# Altium PCB 32-S297PCB.PcbDoc
Units mil, origin at the board's own origin, x right, y up, seen from the top; angles counter-clockwise.
Board outline 3930 x 3915 mil, 2 copper layers (Top Layer, Bottom Layer); 21 components, 42 nets, 117 pads, 0 vias.
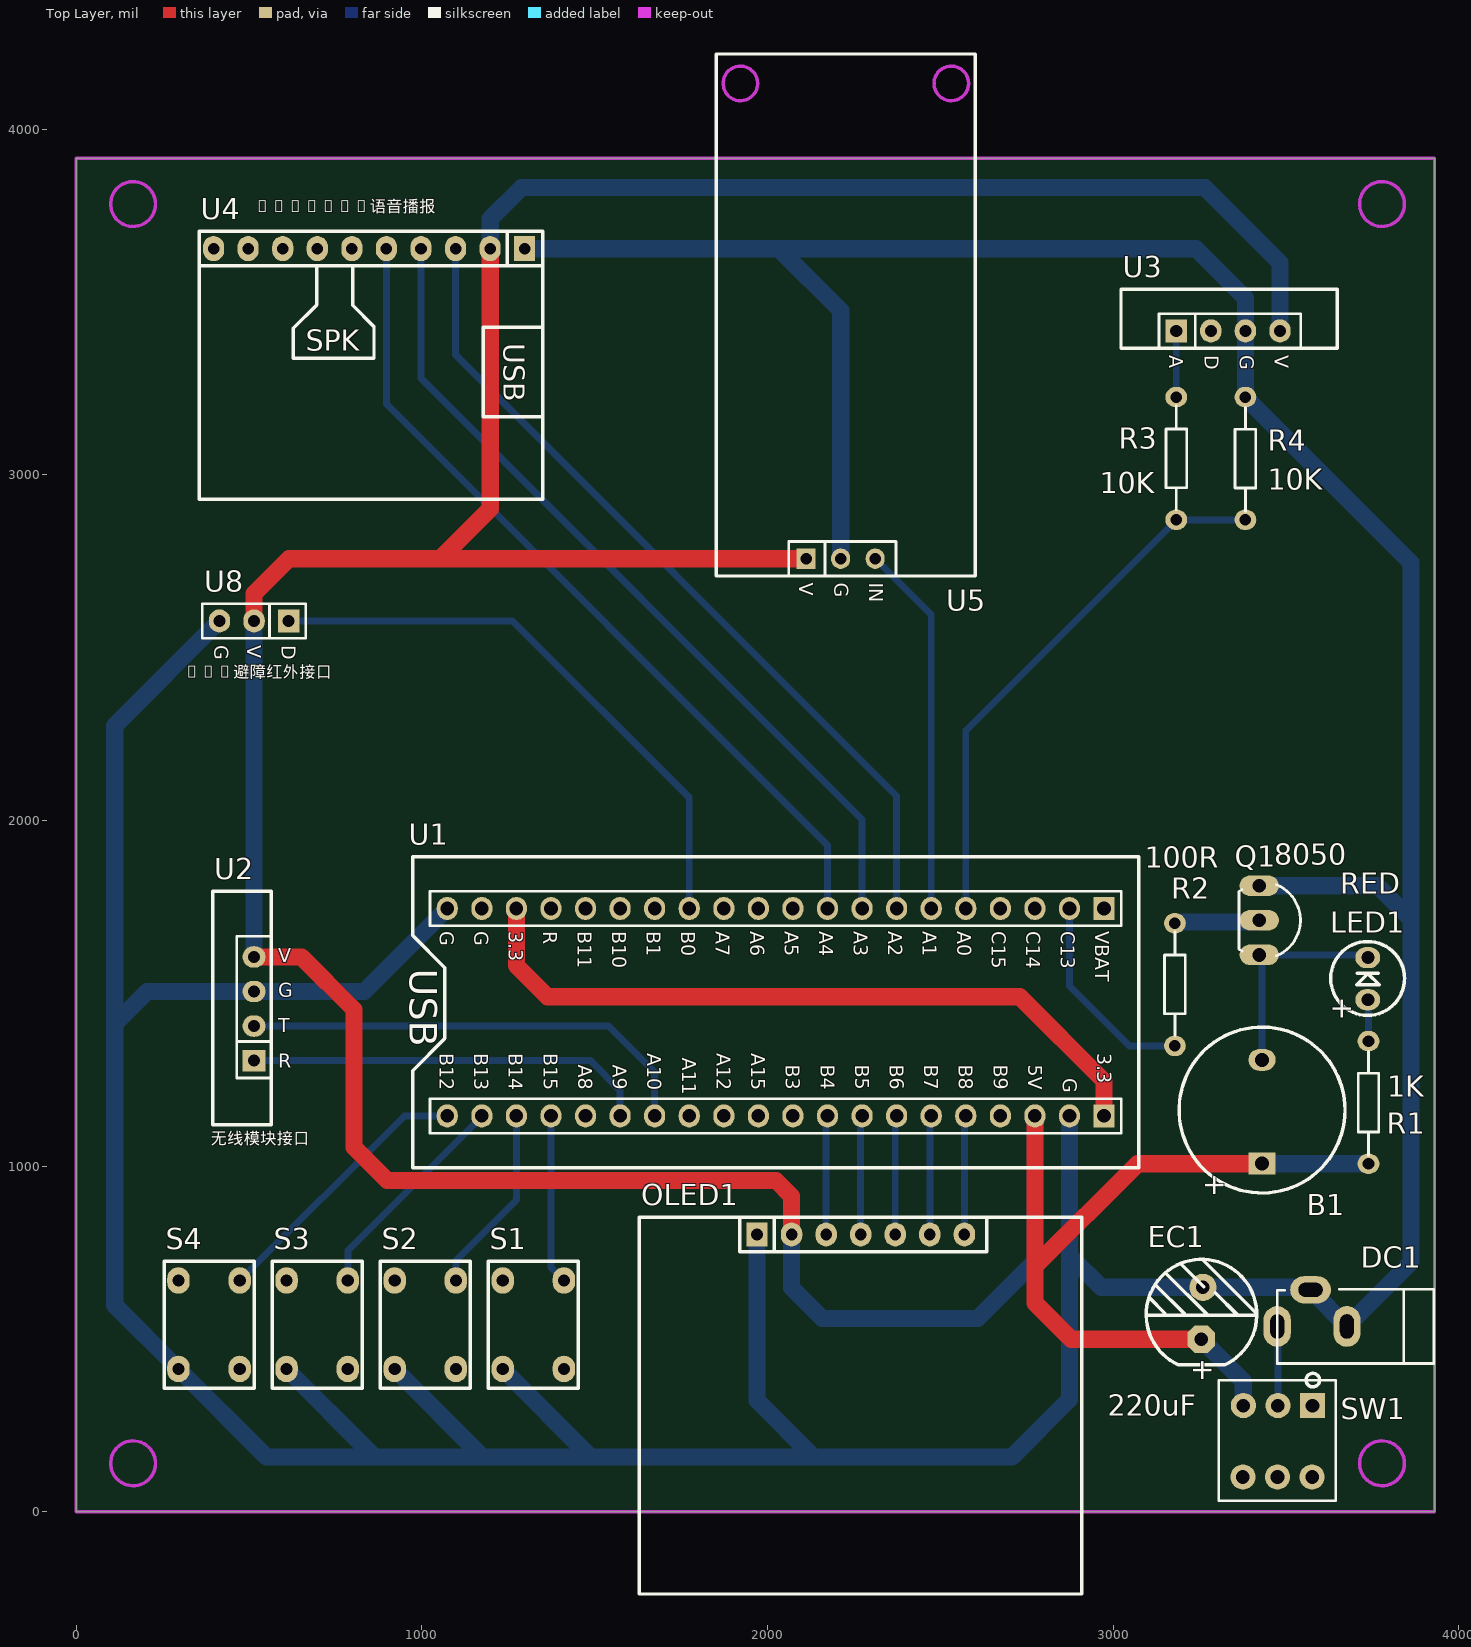
[diagram p0: Top Layer view]
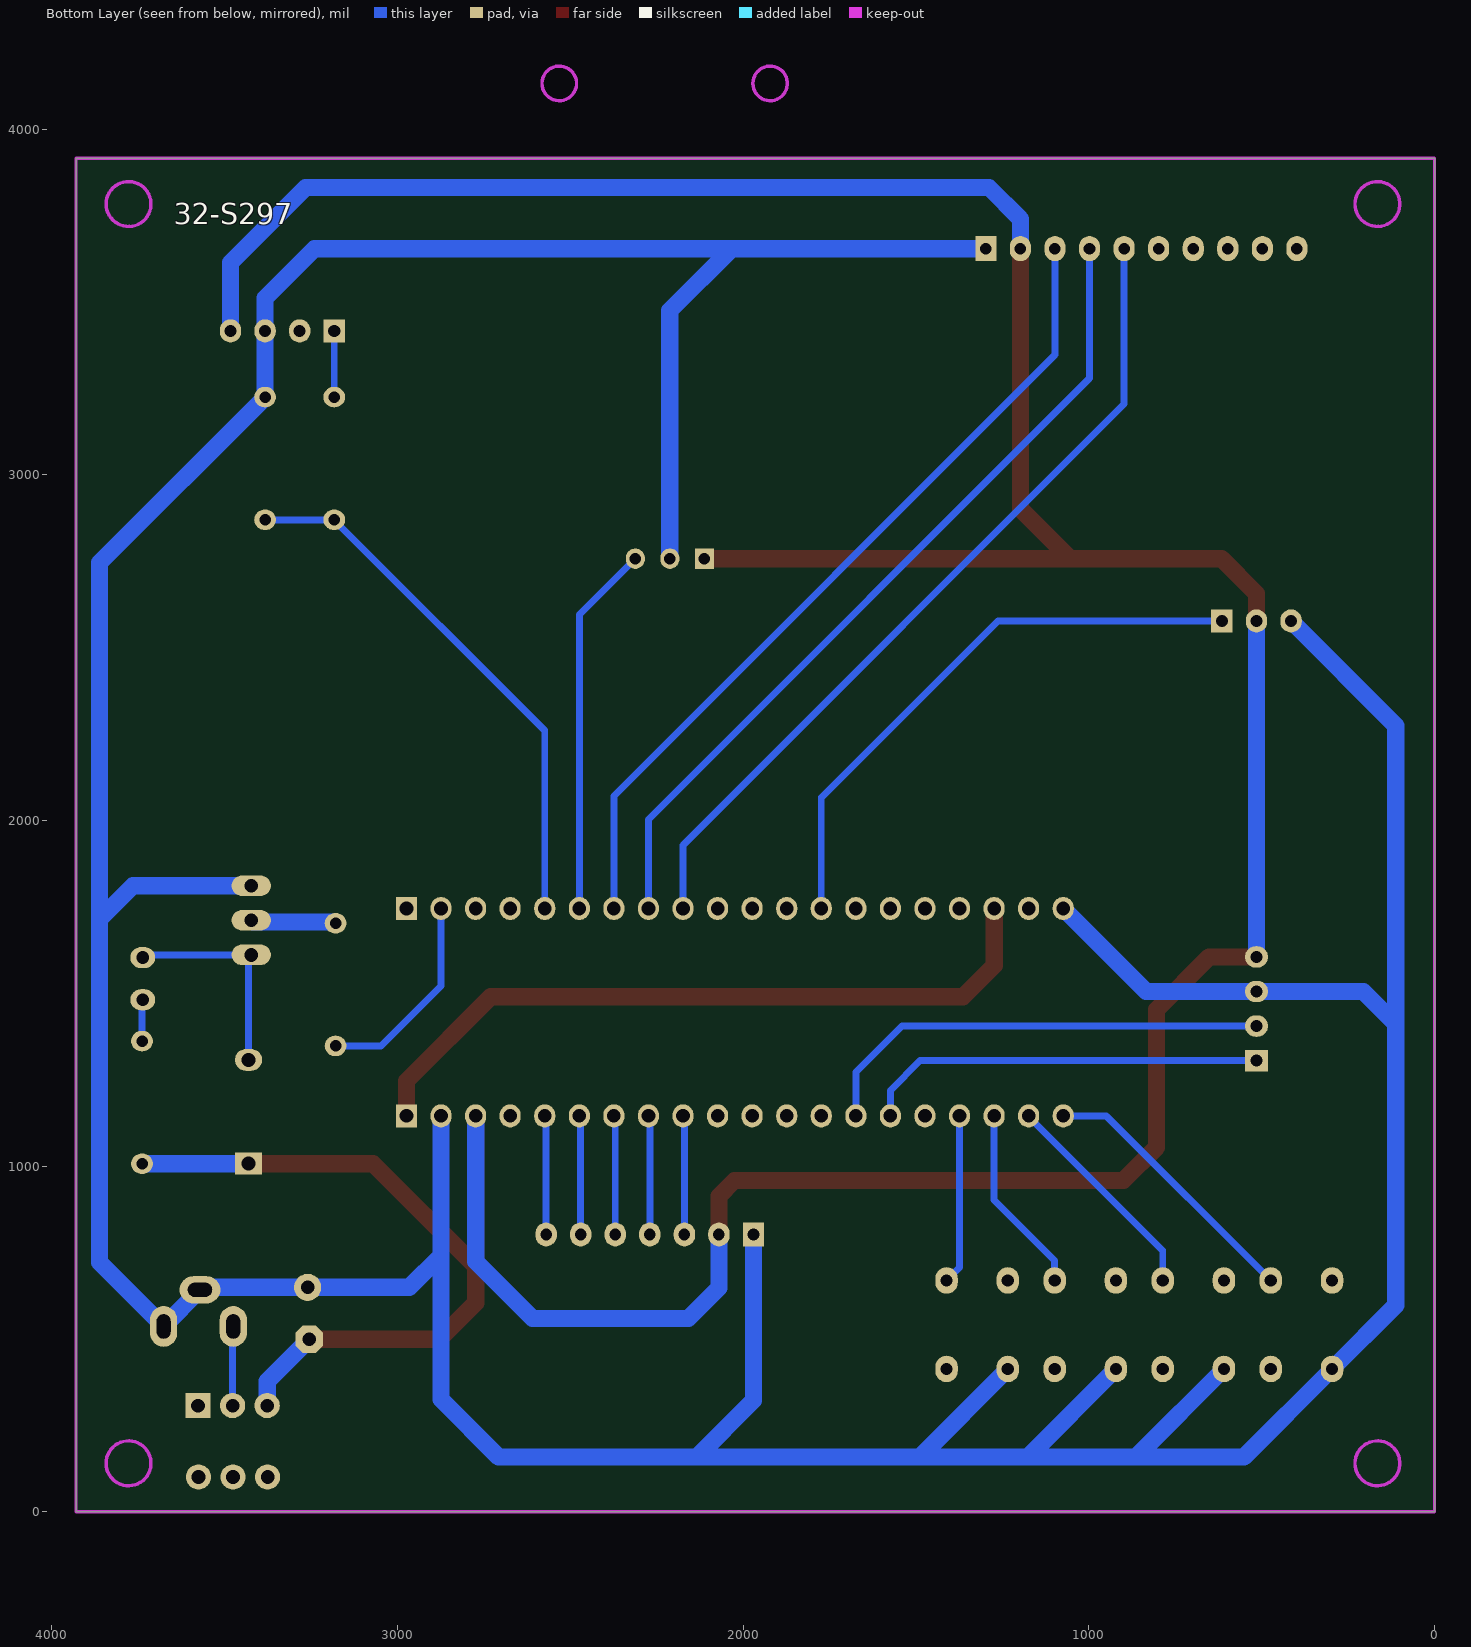
[diagram p1: Bottom Layer view, seen from below]

## Layer stack, top to bottom
Top Solder: solder mask 0.4, Solder Resist, Dk 3.5
Top Layer: signal copper 1.4
Dielectric1: dielectric 12.6, FR-4, Dk 4.8
Bottom Layer: signal copper 1.4
Bottom Solder: solder mask 0.4, Solder Resist, Dk 3.5

## Board outline
0,0 0,3915 3930,3915 3930,0

## Design rules (kind name [scope] priority, off if disabled: settings)
Clearance [All] p1: gap=12
ComponentClearance [All] p1 off: gap=10 collisioncheckmode=3 verticalgap=10 showdistances=FALSE
FabricationTestpoint [(IsPad And (OnTopLayer Or OnBottomLayer))] p1: side=3 testpointundercomponent=TRUE minsize=40 maxsize=100 preferedsize=60 minholesize=0 maxholesize=40 preferedholesize=32 testpointgrid=1 allowsidetop=TRUE allowsidebottom=TRUE usegrid=TRUE gridtolerance=0.01
Height [All] p1 off: minheight=0 maxheight=1000 prefheight=500
HoleSize [All] p1 off: absolutevalues=TRUE maxlimit=100 minlimit=1 maxpercent=80.000 minpercent=20.000
LayerPairs [All] p1 off: enforce=TRUE
PlaneClearance [All] p1 off: clearance=20
PlaneConnect [All] p1 off: planeconnectstyle=Relief reliefexpansion=20 reliefentries=4 reliefconductorwidth=10 reliefairgap=10
PolygonConnect [All] p1 off: connectstyle=Relief reliefconductorwidth=10 reliefentries=4 polygonreliefangle="90 Angle" airgapwidth=10
RoutingVias [All] p1: holewidth=28 width=50 viastyle="Through Hole" minholewidth=28 minwidth=50 maxholewidth=28 maxwidth=50
SilkToSolderMaskClearance SilkscreenOverComponentPads [IsPad] p1: minsilkscreentomaskgap=10 clearancetoexposedcopper=TRUE
SolderMaskExpansion [All] p1: expansion=4
Width [All] p1: maxlimit=100 minlimit=12 preferedwidth=20
22 further rules are at their usual default settings.

## Components (designator, comment, footprint, x,y, rotation, side; value= is the part's Value field where it differs from the comment)
B1 "BUZZER" BUZZERSOT_PLASTIC 3431,1007 r90 top
DC1 "DC接口" DC-JACK-002 3475,536 r0 top
EC1 "220uF" RB.15/.3 3255,499 r90 top
LED1 "RED" LED_D3MM12 3737,1481 r90 top
OLED1 "OLED" OLED_0_96 1970,802 r0 top
Q1 "8050" TO-92 3423,1711 r270 top
R1 "1K" AXIAL0.3 3739,1184 r90 top
R2 "100R" AXIAL0.3 3179,1525 r270 top
R3 "10K" AXIAL0.3 3183,3047 r270 top
R4 "10K" AXIAL0.3 3383,3047 r90 top
S1 "BUTTOM" BUTTON_6x6DIP 1323,541 r90 top
S2 "BUTTOM" BUTTON_6x6DIP 1010.33,541 r90 top
S3 "BUTTOM" BUTTON_6x6DIP 697.67,541 r90 top
S4 "BUTTOM" BUTTON_6x6DIP 385,541 r90 top
SW1 "SW-DPDT" SW 3577,307 r270 top
U1 "STM32_CORE_BLUE" STM32_CORE_BLUE 2974,1745 r270 top
U2 "无线模块接口" 蓝牙MODE竖放 515,1305 r0 top
U3 "传感器模块" 通用MODE竖放 3183,3416 r270 top
U4 "JR6001_语音播报" JR6001_语音播报 1298,3654 r0 top
U5 "继电器模块" 继电器接口 2112,2757 r270 top
U8 "E18避障红外接口" 红外接口 615,2577 r270 top

## Footprints (in the part's own frame and the unit in brackets; to place one, negate y for a bottom-side part, rotate by r counter-clockwise, add the part's x,y. Pads: shape width x height; smd on the part's side, far side on the other; paste and mask are expansions set on the pad)
AXIAL0.3 [mm]
  oval 1.5x1.6 hole 0.85: 1(-4.508,0) 2(4.508,0)
  silkscreen extent -3.87,-0.76 3.75,0.76
BUTTON_6x6DIP [mm]
  oval 1.95x1.65 hole 0.9: 1(-3.25,2.25) 2(3.25,-2.25) ""(-3.25,-2.25) ""(3.25,2.25)
  round 1 on Top Overlay: 3(0,0)
  silkscreen extent -4.67,-3.3 4.67,3.3
BUZZERSOT_PLASTIC [mm]
  rect 1.6x2 hole 1.016: 1(0,0)
  oval 1.6x2 hole 1.016: 2(7.62,0)
  silkscreen extent -2.16,-6.1 10.03,6.09
DC-JACK-002 [mm]
  oval 2x3 hole 1.016 slot 1.778 at 90 deg: 1(0,0) 2(5.12,0)
  oval 3x2 hole 1.016 slot 1.778 at 0 deg: 3(2.45,2.69)
  silkscreen extent 0,-2.73 11.51,2.73
JR6001_语音播报 [mm]
  rect 1.55x1.85 hole 0.85: 1(0,0)
  oval 1.55x1.85 hole 0.85: 2(-2.54,0) 3(-5.08,0) 4(-7.62,0) 5(-10.16,0) 6(-12.7,0) 7(-15.24,0) 8(-17.78,0) 9(-20.32,0) 10(-22.86,0)
  silkscreen extent -23.93,-18.41 1.32,1.27
LED_D3MM12 [mm]
  oval 1.55x1.83 hole 0.95: 1(0,0) 2(3.1,0)
  silkscreen extent -1.14,-2.7 4.28,2.72
OLED_0_96 [mm]
  rect 1.575x1.75 hole 0.85: 1(0,0)
  oval 1.575x1.75 hole 0.85: 2(2.54,0) 3(5.08,0) 4(7.62,0) 5(10.16,0) 6(12.7,0) 7(15.24,0)
  silkscreen extent -8.64,-26.42 23.88,1.27
RB.15/.3 [mm]
  oct 2x2 hole 1: 1(-0.002,-0.004)
  round 2 hole 1: 2(3.81,-0.127)
  silkscreen extent -1.89,-4.09 5.87,4.04
STM32_CORE_BLUE [mm]
  rect 1.7x1.55 hole 1: 1(0,0) 40(15.24,0)
  oval 1.7x1.55 hole 1: 2(0,-2.54) 3(0,-5.08) 4(0,-7.62) 5(0,-10.16) 6(0,-12.7) 7(0,-15.24) 8(0,-17.78) 9(0,-20.32) 10(0,-22.86) 11(0,-25.4) 12(0,-27.94) 13(0,-30.48) 14(0,-33.02) 15(0,-35.56) 16(0,-38.1) 17(0,-40.64) 18(0,-43.18) 19(0,-45.72) 20(0,-48.26) 21(15.24,-48.26) 22(15.24,-45.72) 23(15.24,-43.18) 24(15.24,-40.64) 25(15.24,-38.1) 26(15.24,-35.56) 27(15.24,-33.02) 28(15.24,-30.48) 29(15.24,-27.94) 30(15.24,-25.4) 31(15.24,-22.86) 32(15.24,-20.32) 33(15.24,-17.78) 34(15.24,-15.24) 35(15.24,-12.7) 36(15.24,-10.16) 37(15.24,-7.62) 38(15.24,-5.08) 39(15.24,-2.54)
  silkscreen extent -3.81,-50.8 19.05,2.54
SW [mm]
  rect 1.85x1.85 hole 1: 1(0,0)
  round 1.85 hole 1: 2(0,-2.54) 3(0,-5.08) 4(5.245,-5.11) 5(5.245,-2.57) 6(5.245,-0.03)
  silkscreen extent -2.37,-6.88 6.99,1.71
TO-92 [mm]
  oval 1.5x2.9 hole 1.016: 1(-2.54,0) 2(0,0) 3(2.54,0)
  silkscreen extent -2.61,-1.48 2.61,3.02, body extent -2.77,-1.37 2.77,2.5, height 8.5
红外接口 [mil]
  rect 66.93x62 hole 35: 1(0,0)
  oval 66.93x62 hole 35: 2(0,-100) 3(0,-200)
  silkscreen extent -50,-250 50,50, body extent -50,-250 50,50, height 330
继电器接口 [mm]
  rect 1.5x1.4 hole 0.85: 1(0,0)
  oval 1.5x1.4 hole 0.85: 2(0,2.54) 3(0,5.08)
  Keep-Out Layer circle w0.254: c-34.925,-4.826 r1.27
  Keep-Out Layer circle w0.254: c-34.925,10.668 r1.27
  silkscreen extent -37.08,-6.6 1.27,12.45
蓝牙MODE竖放 [mil]
  rect 66.93x62 hole 35: 1(0,0)
  oval 66.93x62 hole 35: 2(0,100) 3(0,200) 4(0,300)
  silkscreen extent -120,-185 50,490
通用MODE竖放 [mil]
  rect 66.93x62 hole 35: 1(0,0)
  oval 66.93x62 hole 35: 2(0,100) 3(0,200) 4(0,300)
  silkscreen extent -120,-160 50,465

## Part data
B1: "蜂鸣器"
DC1: "DC接口（分大小）"
EC1: library part CAP_EC, "极性电容"
LED1: library part LED, "LED灯"
OLED1: "OLED-0.96"
Q1: library part 9013, "三极管"
R1 R2 R3 R4: library part RES, "电阻"
S1 S2 S3 S4: "按键"
SW1: "电源开关"
U2: library part 蓝牙MODE, "预留串口"
U3: library part 土壤检测MODE, "土壤湿度模块"
U8: library part 避障红外接口, "避障红外探头模块"

## Nets (pads, with @x,y where several pads share a name; then routed paths per layer and width w, separated by ;. In a path a pad name is that pad's centre, name@x,y a point inside that pad or via, vN(x,y) a via of type N, cw(c..) or ccw(c..) an arc to the next point about the centre after c; other vN are vias at no path point)
GND: DC1.2 DC1.3 EC1.2 OLED1.1 Q1.1 R4.2 S1.1 S2.1 S3.1 S4.1 U1.20 U1.39 U2.3 U3.3 U4.1 U5.2 U8.3 | length 16561.1
  Bottom Layer w50: U8.3 112,2274 112,1411 ; S3.1 854,168.13 854,158 ; S2.1 1176.8,158 ; U1.20 834,1505 U2.3 206,1505 112,1411 ; S1.1 1489.46,158 ; U4.1 2033,3654 ; OLED1.1 1970,322 2134,158 ; U5.2 2212,3475 2033,3654 ; U1.39 2874,741 ; Q1.1 3765,1811 3862,1714 ; 112,1411 112,597.47 S4.1 551.47,158 854,158 ; 854,158 1176.8,158 ; 1176.8,158 1489.46,158 ; 1489.46,158 2134,158 ; 2033,3654 3240,3654 3383,3511 U3.3 R4.2 3862,2745.5 3862,1714 ; 2134,158 2707,158 2874,325 2874,741 ; 2874,741 2966,649 EC1.2 3564.36,649 DC1.3 3676.57,536.79 DC1.2 3862,721.43 3862,1714
NetB1_2: B1.2 LED1.2 Q1.3 | length 624.6
  Bottom Layer w20: B1.2 3431,1603 Q1.3 3729.05,1611 LED1.2
NetDC1_1: DC1.1 SW1.2 | length 229.8
  Bottom Layer w20: DC1.1 3477,534 SW1.2
NetLED1_1: LED1.1 R1.2 | length 120.3
  Bottom Layer w20: LED1.1 3739,1479 R1.2
NetQ1_2: Q1.2 R2.1 | length 242.6
  Bottom Layer w50: R2.1@3182.5,1706 3418.01,1706 Q1.2
NetR3_1: R3.1 U3.1 | length 191.5
  Bottom Layer w20: R3.1 U3.1
PA0: R3.2 R4.1 U1.5 | length 1576.8
  Bottom Layer w20: U1.5 2574,2260.5 R3.2 R4.1
PA1: U1.6 U5.3 | length 1079.1
  Bottom Layer w20: U5.3 2474,2595 U1.6
PA2: U1.7 U4.3 | length 2437.5
  Bottom Layer w20: U4.3 1098,3347 2374,2071 U1.7
PA3: U1.8 U4.4 | length 2437.5
  Bottom Layer w20: U4.4 998,3279 2274,2003 U1.8
PA4: U1.9 U4.5 | length 2437.5
  Bottom Layer w20: U4.5 898,3204 2174,1928 U1.9
PA5: U1.10
PA6: U1.11
PA7: U1.12
PA8: U1.25
PA9: U1.26 U2.1 | length 1168.6
  Bottom Layer w20: U2.1 1488,1305 1574,1219 U1.26
PA10: U1.27 U2.2 | length 1341.1
  Bottom Layer w20: U2.2 1541,1405 1674,1272 U1.27
PA11: U1.28
PA12: U1.29
PA15: U1.30
PB0: U1.13 U8.1 | length 1691.7
  Bottom Layer w20: U8.1 1263,2577 1774,2066 U1.13
PB1: U1.14
PB3: U1.31
PB4: OLED1.3 U1.32 | length 344.7
  Bottom Layer w20: OLED1.3 2170,1141 U1.32
PB5: OLED1.4 U1.33 | length 344.7
  Bottom Layer w20: OLED1.4 2270,1141 U1.33
PB6: OLED1.5 U1.34 | length 344.7
  Bottom Layer w20: OLED1.5 2370,1141 U1.34
PB7: OLED1.6 U1.35 | length 344.7
  Bottom Layer w20: OLED1.6 2470,1141 U1.35
PB8: OLED1.7 U1.36 | length 344.7
  Bottom Layer w20: OLED1.7 2570,1141 U1.36
PB9: U1.37
PB10: U1.15
PB11: U1.16
PB12: S4.2 U1.21 | length 797.6
  Bottom Layer w20: S4.2 949.63,1145 U1.21
PB13: S3.2 U1.22 | length 634.7
  Bottom Layer w20: S3.2 786.25,755.25 U1.22@1174,1143
PB14: S2.2 U1.23 | length 548.6
  Bottom Layer w20: S2.2 1098.92,726.92 1274,902 U1.23
PB15: S1.2 U1.24 | length 491.6
  Bottom Layer w20: U1.24 1374,706.53 S1.2
PC13: R2.2 U1.2 | length 600.9
  Bottom Layer w20: U1.2 2874,1521 3047.5,1347.5 R2.2
PC14: U1.3
PC15: U1.4
RST: U1.17
VBAT: U1.1
VCC_3.3V: U1.18 U1.40 | length 2104.3
  Top Layer w50: U1.18 1274,1580 1364,1490 2730,1490 2974,1246 U1.40
VCC_5V: B1.1 EC1.1 OLED1.2 R1.1 SW1.3 U1.38 U2.4 U3.4 U4.2 U5.1 U8.2 | length 12299.5
  Top Layer w50: U2.4 652,1605 804,1453 804,1054 900,958 2025,958 2070,913 OLED1.2 ; U8.2 515,2656 616,2757 U5.1 ; 1061,2764 1198,2901 U4.2 ; U1.38 2774,710 ; EC1.1 2879.09,498.91 2774,604 2774,710 ; B1.1 3071,1007 2774,710
  Bottom Layer w50: U2.4 U8.2 ; U4.2 1198,3740 1289,3831 3265,3831 3483,3613 U3.4 ; OLED1.2 2070,648 2159,559 2609,559 2774,724 U1.38 ; EC1.1 3377,377.08 SW1.3 ; B1.1 3431.5,1006.5 R1.1
pads on no net: S1. S1.3 S2. S2.3 S3. S3.3 S4. S4.3 SW1.1 SW1.4 SW1.5 SW1.6 U1.19 U3.2 U4.6 U4.7 U4.8 U4.9 U4.10

## Keep-outs
Keep-Out Layer:
  circle w10: c165.04,140 r64.96
  circle w10: c165.04,3783 r64.96
  circle w10: c3778.04,3783 r64.96
  circle w10: c3778.04,140 r64.96
  lines w10: 0,0 3930,0 3930,3915 0,3915 0,0

## Silkscreen, mask and mechanical layers (free items; w line width, h text height)
Bottom Overlay:
  text "32-S297" at 3647,3725 h60

## Dimensions
-1,3907 to 6,-2 on Top Overlay
3930,3922 to 0,3915 on Top Overlay

## Text inside footprints (layer, text, board x,y; h text height)
B1: Top Overlay "+" at 3320,910 h60 r90
EC1: Top Overlay "+" at 3285,374 h60 r90
LED1: Top Overlay "+" at 3689,1421 h60 r90
U1: Top Overlay "USB" at 965,1571 h80 r270; Top Overlay "C13" at 2848.21,1679 h40 r270; Top Overlay "C14" at 2748.42,1679 h40 r270; Top Overlay "R" at 1351.37,1679 h40 r270; Top Overlay "B11" at 1451.16,1679 h40 r270; Top Overlay "B10" at 1550.95,1679 h40 r270; Top Overlay "B1" at 1650.74,1679 h40 r270; Top Overlay "B0" at 1750.53,1679 h40 r270; Top Overlay "A0" at 2548.84,1679 h40 r270; Top Overlay "A1" at 2449.05,1679 h40 r270; Top Overlay "A2" at 2349.26,1679 h40 r270; Top Overlay "A3" at 2249.47,1679 h40 r270; Top Overlay "A4" at 2149.68,1679 h40 r270; Top Overlay "A5" at 2049.89,1679 h40 r270; Top Overlay "A6" at 1950.1,1679 h40 r270; Top Overlay "A7" at 1850.32,1679 h40 r270; Top Overlay "VBAT" at 2948,1679 h40 r270; Top Overlay "3.3" at 1251.58,1679 h40 r270; Top Overlay "G" at 1151.79,1679 h40 r270; Top Overlay "G" at 1052,1679 h40 r270; Top Overlay "B12" at 1052,1327 h40 r270; Top Overlay "B13" at 1152.16,1327 h40 r270; Top Overlay "B14" at 1252.32,1327 h40 r270; Top Overlay "B15" at 1352.47,1327 h40 r270; Top Overlay "A8" at 1452.63,1293.68 h40 r270; Top Overlay "A9" at 1552.79,1293.68 h40 r270; Top Overlay "A10" at 1652.95,1327 h40 r270; Top Overlay "A11" at 1753.1,1313.67 h40 r270; Top Overlay "A12" at 1853.26,1327 h40 r270; Top Overlay "A15" at 1953.42,1327 h40 r270; Top Overlay "B3" at 2053.58,1293.68 h40 r270; Top Overlay "B4" at 2153.74,1293.68 h40 r270; Top Overlay "B5" at 2253.89,1293.68 h40 r270; Top Overlay "B6" at 2354.05,1293.68 h40 r270; Top Overlay "B7" at 2454.21,1293.68 h40 r270; Top Overlay "B8" at 2554.37,1293.68 h40 r270; Top Overlay "B9" at 2654.52,1293.68 h40 r270; Top Overlay "5V" at 2754.68,1293.68 h40 r270; Top Overlay "G" at 2854.84,1253.69 h40 r270; Top Overlay "3.3" at 2955,1327 h40 r270; Top Overlay "C15" at 2648.63,1679 h40 r270
U2: Top Overlay "V" at 585,1590 h40; Top Overlay "R" at 585,1285 h40; Top Overlay "G" at 585,1488.33 h40; Top Overlay "T" at 585,1386.67 h40
U3: Top Overlay "V" at 3468,3346 h40 r270; Top Overlay "A" at 3163,3346 h40 r270; Top Overlay "G" at 3366.33,3346 h40 r270; Top Overlay "D" at 3264.67,3346 h40 r270
U4: Top Overlay "USB" at 1237,3380 h60 r270; Top Overlay "SPK" at 664,3359 h60
U5: Top Overlay "G" at 2193.67,2687 h40 r270; Top Overlay "IN" at 2295.33,2687 h40 r270; Top Overlay "V" at 2092,2687 h40 r270
U8: Top Overlay "G" at 400,2507 h40 r270; Top Overlay "D" at 595,2507 h40 r270; Top Overlay "V" at 495,2507 h40 r270